# Altium PCB Pogopins.PcbDoc
Units mm, origin at the board's own origin, x right, y up, seen from the top; angles counter-clockwise.
Board outline 69.1 x 54 mm, 2 copper layers (Top Layer, Bottom Layer); 64 components, 45 nets, 235 pads, 26 vias.
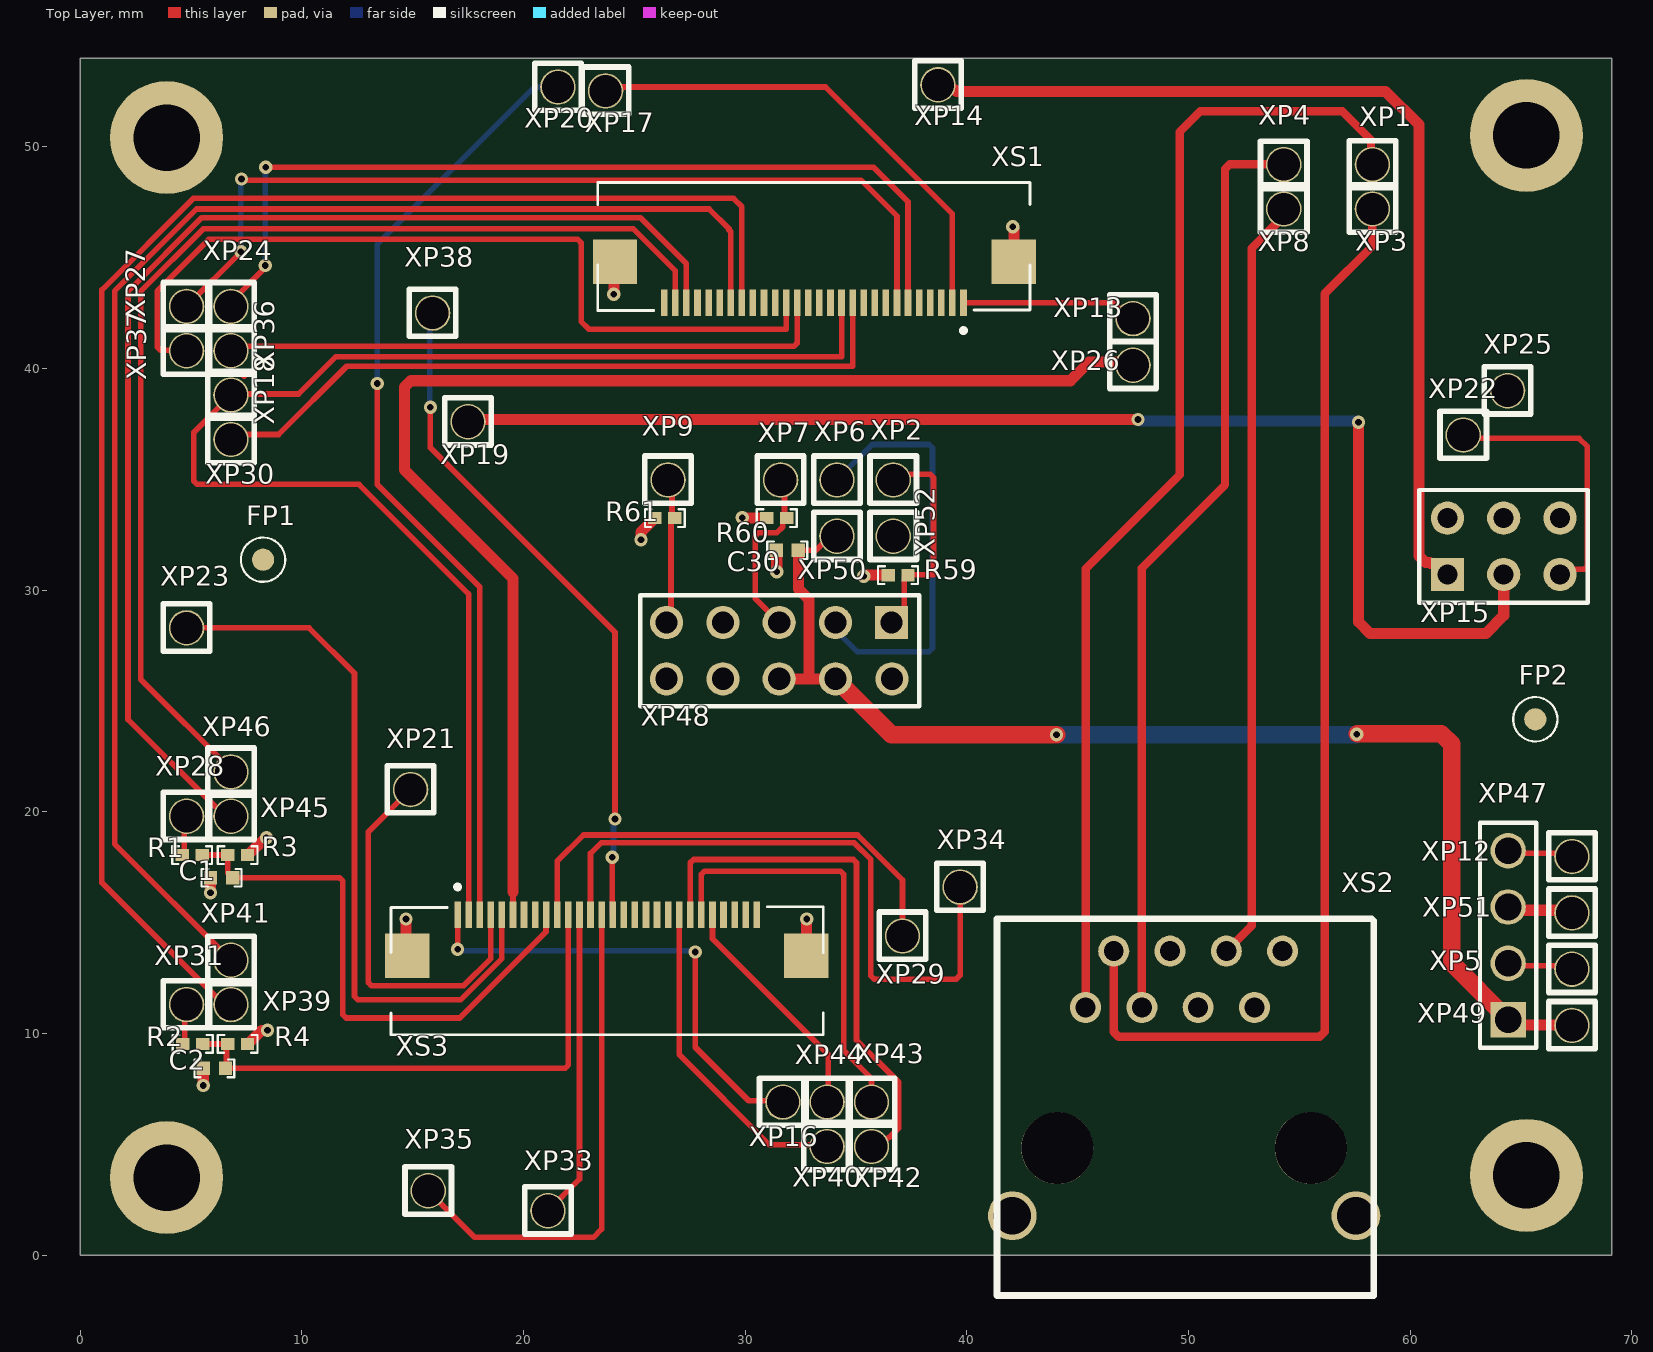
[diagram p0: Top Layer view]
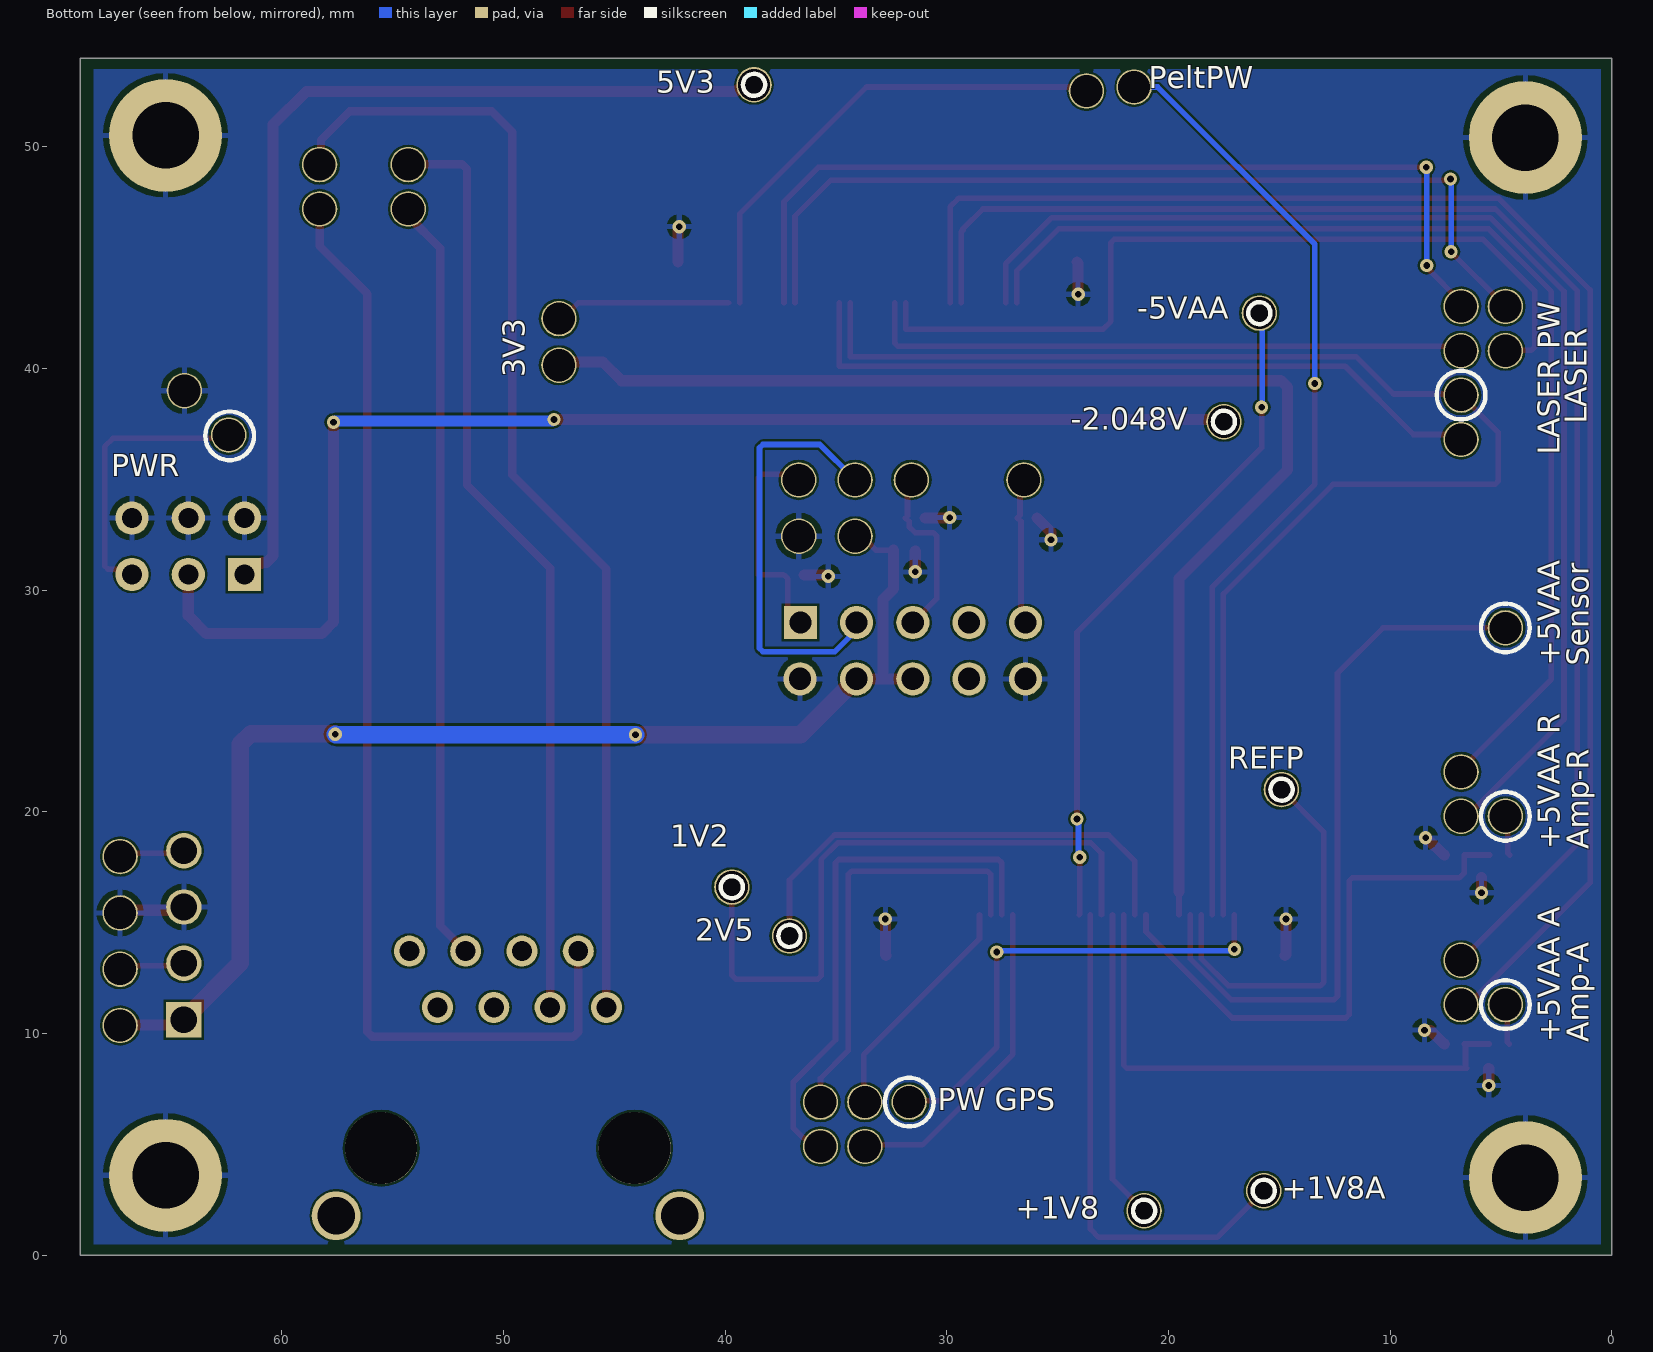
[diagram p1: Bottom Layer view, seen from below]
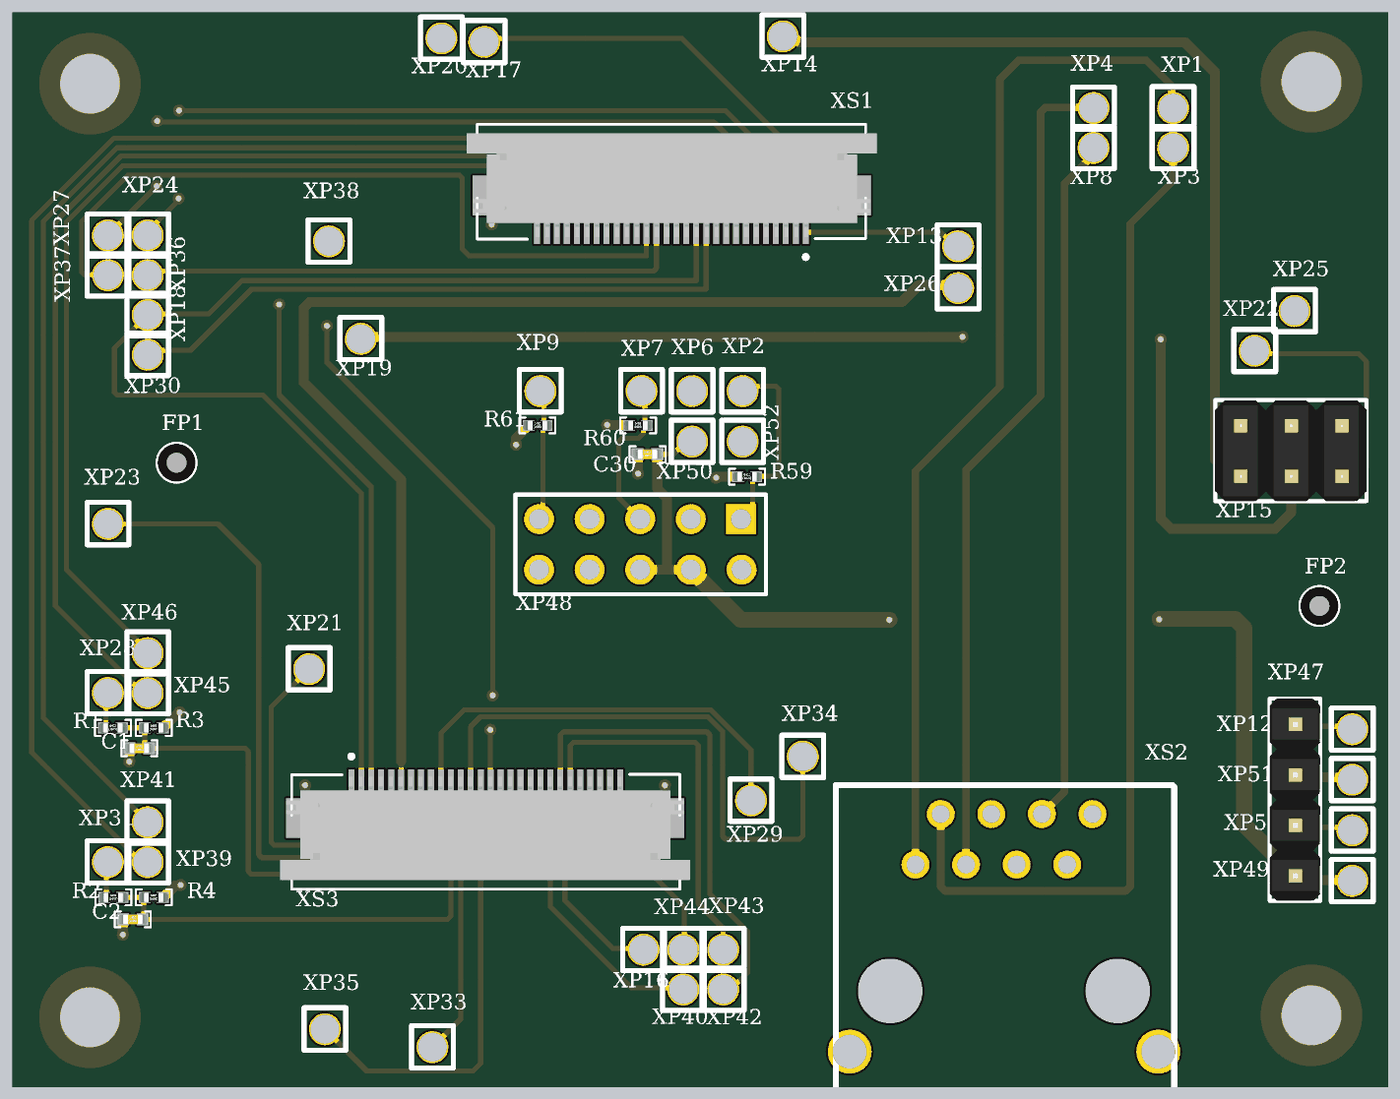
[diagram p2: 3D render of the assembled board from above, using the file's embedded part models]

## Layer stack, top to bottom
Top Solder: solder mask 0.0102, Solder Resist, Dk 3.5
Top Layer: signal copper 0.0356
Dielectric 1: dielectric 0.32, FR-4, Dk 4.8
Bottom Layer: signal copper 0.0356
Bottom Solder: solder mask 0.0102, Solder Resist, Dk 3.5

## Board outline
0,0 0,54 69.1,54 69.1,0

## Design rules (kind name [scope] priority, off if disabled: settings)
Clearance [All] p1: gap=0.1 ignorepadtopadclearanceinfootprint=TRUE
DiffPairsRouting [All] p1: maxlimit=0.254 minlimit=0.254 mostfreqgap=0.254 toplayer_minwidth=0.381 toplayer_maxwidth=0.381 toplayer_prefwidth=0.381 bottomlayer_minwidth=0.381 bottomlayer_maxwidth=0.381 bottomlayer_prefwidth=0.381 maxuncoupledlength=12.7
Height [All] p1: minheight=0 maxheight=35 prefheight=12.7
HoleSize [All] p1: absolutevalues=TRUE maxlimit=5 minlimit=0.025 maxpercent=80.000 minpercent=20.000
MinimumSolderMaskSliver [All] p1: minsoldermaskwidth=0
PolygonConnect [All] p1: connectstyle=Relief reliefconductorwidth=0.254 reliefentries=4 polygonreliefangle="90 Angle" airgapwidth=0.254
RoutingVias [All] p1: holewidth=0.711 width=1.27 viastyle="Through Hole" minholewidth=0.711 minwidth=1.27 maxholewidth=0.711 maxwidth=1.27
SilkToSilkClearance [All] p1: silktosilkclearance=0
SilkToSolderMaskClearance [IsPad] p1: minsilkscreentomaskgap=0 clearancetoexposedcopper=TRUE
SolderMaskExpansion [All] p1: expansion=0.102 istentingtop=FALSE
Width [All] p1: maxlimit=0.8 minlimit=0.1 preferedwidth=0.254
24 further rules are at their usual default settings.

## Classes and differential pairs
differential pair E_TX: +E_TX_P -E_TX_N
differential pair E_RX: +E_RX_P -E_RX_N

## Components (designator, comment, footprint, x,y, rotation, side; value= is the part's Value field where it differs from the comment)
C1 "100nF" 0402C 6.375,17.025 r0 top
C2 "100nF" 0402C 6.05,8.425 r0 top
C30 "10uF" 0402C 31.9,31.8 r0 top
FP1 "FIDUCIAL" "FIDICIAL POINT - R0.3" 8.25,31.375 r0 top
FP2 "FIDUCIAL" "FIDICIAL POINT - R0.3" 65.65,24.175 r0 top
R1 "100K" R0402 5.05,18.05 r0 top
R2 "100K" R0402 5.075,9.525 r0 top
R3 "56K" R0402 7.1,18.05 r0 top
R4 "56K" R0402 7.1,9.525 r0 top
R59 "10K" R0402 36.9,30.675 r0 top
R60 "10K" R0402 31.425,33.25 r0 top
R61 "10K" R0402 26.375,33.25 r0 top
XP1 "PA" "POGO PIN P100-A2/B1" 58.3,49.2 r0 top
XP2 "PA" "POGO PIN P100-A2/B1" 36.68,34.975 r0 top locked
XP3 "PA" "POGO PIN P100-A2/B1" 58.3,47.2 r0 top
XP4 "PA" "POGO PIN P100-A2/B1" 54.3,49.2 r180 top locked
XP5 "PA" "POGO PIN P100-A2/B1" 67.3,12.9 r0 top locked
XP6 "PA" "POGO PIN P100-A2/B1" 34.14,34.975 r0 top locked
XP7 "PA" "POGO PIN P100-A2/B1" 31.6,34.975 r0 top locked
XP8 "PA" "POGO PIN P100-A2/B1" 54.3,47.2 r0 top
XP9 "PA" "POGO PIN P100-A2/B1" 26.52,34.975 r0 top locked
XP12 "PA" "POGO PIN P100-A2/B1" 67.3,17.98 r0 top locked
XP13 "PA" "POGO PIN P100-A2/B1" 47.5,42.25 r0 top
XP14 "PB" "POGO PIN P100-A2/B1" 38.7,52.8 r0 top
XP15 "PLD-6" PLD-6 61.685,30.71 r0 top
XP16 "PB" "POGO PIN P100-A2/B1" 31.7,6.9 r0 top locked
XP17 "PA" "POGO PIN P100-A2/B1" 23.7,52.525 r0 top
XP18 "PB" "POGO PIN P100-A2/B1" 6.8,38.8 r0 top
XP19 "PB" "POGO PIN P100-A2/B1" 17.5,37.6 r0 top
XP20 "PB" "POGO PIN P100-A2/B1" 21.55,52.7 r0 top
XP21 "PB" "POGO PIN P100-A2/B1" 14.907,21.003 r0 top locked
XP22 "PA" "POGO PIN P100-A2/B1" 62.4,37 r0 top
XP23 "PB" "POGO PIN P100-A2/B1" 4.8,28.3 r0 top
XP24 "PA" "POGO PIN P100-A2/B1" 6.8,42.8 r0 top
XP25 "PA" "POGO PIN P100-A2/B1" 64.4,39 r0 top
XP26 "PB" "POGO PIN P100-A2/B1" 47.5,40.15 r0 top
XP27 "PA" "POGO PIN P100-A2/B1" 4.8,42.8 r0 top
XP28 "PA" "POGO PIN P100-A2/B1" 4.8,19.8 r0 top
XP29 "PB" "POGO PIN P100-A2/B1" 37.1,14.4 r0 top
XP30 "PA" "POGO PIN P100-A2/B1" 6.8,36.8 r0 top
XP31 "PA" "POGO PIN P100-A2/B1" 4.8,11.3 r0 top
XP33 "PB" "POGO PIN P100-A2/B1" 21.1,2 r0 top
XP34 "PB" "POGO PIN P100-A2/B1" 39.7,16.602 r0 top locked
XP35 "PB" "POGO PIN P100-A2/B1" 15.7,2.9 r0 top
XP36 "PA" "POGO PIN P100-A2/B1" 6.8,40.8 r0 top
XP37 "PA" "POGO PIN P100-A2/B1" 4.8,40.8 r0 top
XP38 "PB" "POGO PIN P100-A2/B1" 15.9,42.5 r0 top
XP39 "PA" "POGO PIN P100-A2/B1" 6.8,11.3 r0 top
XP40 "PA" "POGO PIN P100-A2/B1" 33.7,4.9 r0 top locked
XP41 "PA" "POGO PIN P100-A2/B1" 6.8,13.3 r0 top
XP42 "PA" "POGO PIN P100-A2/B1" 35.7,4.9 r0 top locked
XP43 "PA" "POGO PIN P100-A2/B1" 35.7,6.9 r0 top locked
XP44 "PA" "POGO PIN P100-A2/B1" 33.7,6.9 r0 top locked
XP45 "PA" "POGO PIN P100-A2/B1" 6.8,19.8 r0 top locked
XP46 "PA" "POGO PIN P100-A2/B1" 6.8,21.8 r0 top locked
XP47 "PLS-4" PLS-4 64.425,14.435 r90 top
XP48 "20021111-00010T4LF" 20021111-00010T4LF 36.6,28.54 r180 top
XP49 "PA" "POGO PIN P100-A2/B1" 67.3,10.36 r0 top locked
XP50 "PA" "POGO PIN P100-A2/B1" 34.14,32.435 r0 top locked
XP51 "PA" "POGO PIN P100-A2/B1" 67.3,15.44 r0 top locked
XP52 "PA" "POGO PIN P100-A2/B1" 36.68,32.435 r0 top locked
XS1 "52437-2833" MOLEX_52437-2833 33.125,44.5 r180 top
XS2 "DS1126" DS1126 45.36,11.175 r0 top
XS3 "52437-2833" MOLEX_52437-2833 23.75,13.825 r0 top

## Footprints (in the part's own frame and the unit in brackets; to place one, negate y for a bottom-side part, rotate by r counter-clockwise, add the part's x,y. Pads: shape width x height; smd on the part's side, far side on the other; paste and mask are expansions set on the pad)
0402C [mm]
  rect 0.6x0.6 smd: 1(-0.5,0) 2(0.5,0)
  silkscreen extent -0.9,-0.4 0.9,0.4, body extent -0.73,-0.25 0.73,0.25, height 0.51
20021111-00010T4LF [mm]
  rect 1.5x1.5 hole 1: 1(0,0)
  round 1.5 hole 1: 2(-0.025,2.54) 3(2.525,0) 4(2.525,2.54) 5(5.065,0) 6(5.065,2.54) 7(7.605,0) 8(7.605,2.54) 9(10.145,0) 10(10.145,2.54)
  silkscreen extent -1.25,-1.23 11.34,3.77
DS1126 [mm] "RJ-45 Sheilded Connector"
  round 1.4 hole 0.9: 1(0,0) 2(1.27,2.54) 3(2.54,0) 4(3.81,2.54) 5(5.08,0) 6(6.35,2.54) 7(7.62,0) 8(8.89,2.54)
  round 2.2 hole 1.7: 9(-3.305,-9.4) 10(12.195,-9.4)
  round 3.25 hole 3.25 unplated: 11(10.16,-6.35) 12(-1.27,-6.35)
  silkscreen extent -4,-13 13,4
"FIDICIAL POINT - R0.3" [mm]
  round 1 smd mask+0.5: 1(0,0)
  Top Layer pour cut-out: -0.956,0.021 -0.888,-0.347 -0.684,-0.66 -0.376,-0.872 -0.01,-0.95 -0.01,-0.95 0.353,-0.887 0.664,-0.691 0.877,-0.39 0.958,-0.03 0.956,0 0.889,0.36 0.69,0.667 0.388,0.874 0.03,0.95 0.03,0.95 -0.339,0.888 -0.655,0.69 -0.872,0.385 -0.956,0.021
  silkscreen extent -1,-1 1,1
MOLEX_52437-2833 [mm] "Easy-On FFC/FPC Connector, 0.50mm Pitch, Slider Series, Right-Angle, Bottom Contact, 2.00mm Height, 28 Circuits, Tin-Silver-Bismuth Plating"
  rect 0.3x1.2 smd: 1(-6.725,1.538) 2(-6.225,1.538) 3(-5.725,1.538) 4(-5.225,1.538) 5(-4.725,1.538) 6(-4.225,1.538) 7(-3.725,1.538) 8(-3.225,1.538) 9(-2.725,1.538) 10(-2.225,1.538) 11(-1.725,1.538) 12(-1.225,1.538) 13(-0.725,1.538) 14(-0.225,1.538) 15(0.275,1.538) 16(0.775,1.538) 17(1.275,1.538) 18(1.775,1.538) 19(2.275,1.538) 20(2.775,1.538) 21(3.275,1.538) 22(3.775,1.538) 23(4.275,1.538) 24(4.775,1.538) 25(5.275,1.538) 26(5.775,1.538) 27(6.275,1.538) 28(6.775,1.538)
  rect 2x2 smd: S1(-9,-0.312) S2(9,-0.312)
  silkscreen extent -9.72,-3.89 9.78,2.89, body extent -10.3,-3.42 10.3,1.78, height 2
PLD-6 [mm]
  rect 1.5x1.5 hole 0.9: 1(0,0)
  round 1.5 hole 0.9: 2(0,2.54) 3(2.54,0) 4(2.54,2.54) 5(5.08,0) 6(5.08,2.54)
  silkscreen extent -1.27,-1.27 6.32,3.81, body extent -1.27,-1.27 6.35,3.81, height 9.2
PLS-4 [mm]
  rect 1.6x1.6 hole 1.2: 1(-3.81,0)
  round 1.6 hole 1.2: 2(-1.27,0) 3(1.27,0) 4(3.81,0)
  silkscreen extent -5.08,-1.27 5.08,1.27, body extent -5.08,-1.27 5.08,1.27, height 9.2
"POGO PIN P100-A2/B1" [mm]
  round 1.6 hole 1.45: 1(0,0)
  silkscreen extent -1.05,-1.05 1.05,1.08, body extent -0.69,-0.7 0.7,0.7, height 33.35
R0402 [mm] "Resistor 0402"
  rect 0.6x0.55 smd: 1(-0.45,0) 2(0.45,0)
  silkscreen extent -0.9,-0.4 0.9,0.4, body extent -0.73,-0.25 0.73,0.25, height 0.51

## Part data
C1 C2: library part "C0402-100nF 10% 50V", "C0402-100nF 10% 50V", Part Number="SMD CAP CER 100nF ±10% 50V X5R 0402", Added_by=Rutel@Mail.ru, Created_at=27/03/2020, Mount=MOUNT, MountType=SMD, Pkg=0402, Solder_Amount=2
C30: library part "C0402-10UF 10% 10V", "C0402-10UF 10% 10V", Part Number="SMD CAP CER 10UF ±10% 10V X5R 0402", Added_by=Rutel@Mail.ru, Created_at=27/03/2020, Mount=MOUNT, MountType=SMD, Pkg=0402, Solder_Amount=2
FP1 FP2: library part FIDUCIAL_R1, Adder_by=ridel_av@teslatec.ru, Created_at=22/03/2020, Mount=-, MountType=-, Pkg=-, Solder_Amount=-
R1 R2: library part R0402-100K, "Resistor SMD 100K 1% 0402", Part Number="SMD RES 100 KOHM 1% ±100ppm/°C 0402", Added_by=Rutel@teslatec.ru, Created_at=21/04/2020, Mount=MOUNT, MountType=SMD, Pkg=0402, Solder_Amount=2
R3 R4: library part R0402-56K, "Resistor SMD 56K 1% 0402", Part Number="SMD RES 56K KOHM 1% ±100ppm/°C 0402", Added_by=ridel_av@teslatec.ru, Created_at=15/12/2021, Mount=MOUNT, MountType=SMD, Pkg=0402, Solder_Amount=2
R59 R60 R61: library part R0402-10K, "Resistor SMD 10K 1% 0402", Part Number="SMD RES 10 KOHM 1% ±100ppm/°C 0402", Added_by=Rutel@teslatec.ru, Created_at=21/04/2020, Mount=MOUNT, MountType=SMD, Pkg=0402, Solder_Amount=2
XP1 XP2 XP3 XP4 XP5 XP6 XP7 XP8 XP9 XP12 XP13 XP17 XP22 XP24 XP25 XP27 XP28 XP30 XP31 XP36 XP37 XP39 XP40 XP41 XP42 XP43 XP44 XP45 XP46 XP49 XP50 XP51 XP52: library part "P100-A2 / P100-A", "Pogo pin, 33.35x1.36", Added_by=irdolgopolowa@yandex.ru, Created_at=29/10/24, Mount=MOUNT, MountType=THM, Part Number="P100-A2 / P100-A"
XP14 XP16 XP18 XP19 XP20 XP21 XP23 XP26 XP29 XP33 XP34 XP35 XP38: library part P100-B1, "Pogo pin, 33.35x1.36", Added_by=irdolgopolowa@yandex.ru, Created_at=29/10/24, Mount=MOUNT, MountType=THM, Part Number=P100-B1
XP15: "Pin Header Pitch 2.54mm", Part Number="PLD-6 (DS1021-2x3)", Added_by=ponomarev_ke@teslatec.ru, Created_at=21/05/2019, Mount=MOUNT, MountType=THM, Pkg="PLD-6 2.54mm", Solder_Amount=6
XP47: "HEADER 2.54mm", Added_by=irdolgopolowa@yandex.ru, Cable/Wire="МГТФ 0,35 кв.мм ГОСТ", Created_at=29/10/24, Mating Part=BLS-4, Mating Terminals="BL-T (DS-1071)", Mount=MOUNT, MountType=THM, Part Number=PLS-4, Pkg=PLS-4, Solder_Amount=4
XP48: "20021111-00010T4LF. pin 10", Added_by=irdolgopolowa@yandex.ru, Created_at=29/10/24, Mount=MOUNT, MountType=THM, Part Number=20021111-00010T4LF, Pkg=20021111-00010T4LF, Solder_Amount=10
XS1 XS3: "28 Position FFC, FPC Connector Contacts, Bottom 0.020 _0.50mm_ Surface Mount, Right Angle", Part Number="52437-2833 (MOLEX)", Added_by=ridel_av@teslatec.ru, Mating Part="FFCA 28pin, 0.5mm pitch, AVM 20624 80C 60V VW-1", Mount=MOUNT, MountType=SMD, Pkg=52437-2833, Solder_Amount=30
XS2: "Ethernet PCB 8/8 RJ45", Added_by=irdolgopolowa@yandex.ru, Created_at=29/10/24, Mount=MOUNT, MountType=THM, Part Number=DS1126, Pkg=RJ-45, Solder_Amount=12

## Free pads (board coordinates)
  round 5.1 hole 3 mask+0.102: 1(3.9,50.422) 2(65.25,50.52) 3(65.25,3.6) 4(3.9,3.5)
  round 0.113 on Bottom Overlay: 1(4.114,11.3) 1(4.114,19.8) 1(4.114,28.3) 1(4.114,40.8) 1(4.114,42.8) 1(5.474,11.3) 1(5.474,19.8) 1(5.474,28.3) 1(5.474,40.8) 1(5.474,42.8) 1(6.114,11.3) 1(6.114,13.3) 1(6.114,19.8) 1(6.114,21.8) 1(6.114,36.8) 1(6.114,38.8) 1(6.114,40.8) 1(6.114,42.8) 1(7.474,11.3) 1(7.474,13.3) 1(7.474,19.8) 1(7.474,21.8) 1(7.474,36.8) 1(7.474,38.8) 1(7.474,40.8) 1(7.474,42.8) 1(21.114,52.7) 1(22.474,52.7) 1(31.014,6.9) 1(32.374,6.9) 1(38.014,52.8) 1(39.374,52.8) 1(46.814,40.3) 1(48.174,40.3) 1(53.614,47.2) 1(53.614,49.2) 1(54.974,47.2) 1(54.974,49.2) 1(57.614,47.2) 1(57.614,49.2) 1(58.974,47.2) 1(58.974,49.2) 1(61.714,37) 1(63.074,37) 1(63.714,39) 1(65.074,39)
  round 1.373 on Bottom Overlay: 1(4.8,11.3) 1(4.8,19.8) 1(4.8,28.3) 1(4.8,40.8) 1(4.8,42.8) 1(6.8,11.3) 1(6.8,13.3) 1(6.8,19.8) 1(6.8,21.8) 1(6.8,36.8) 1(6.8,38.8) 1(6.8,40.8) 1(6.8,42.8) 1(21.8,52.7) 1(23.6,52.7) 1(31.7,6.9) 1(38.7,52.8) 1(47.5,40.3) 1(47.5,42.1) 1(54.3,47.2) 1(54.3,49.2) 1(58.3,47.2) 1(58.3,49.2) 1(62.4,37) 1(64.4,39)

## Via types
v1: diameter 0.6, hole 0.3, Top Layer to Bottom Layer, tented both sides, 26 vias

## Nets (pads, with @x,y where several pads share a name; then routed paths per layer and width w, separated by ;. In a path a pad name is that pad's centre, name@x,y a point inside that pad or via, vN(x,y) a via of type N, cw(c..) or ccw(c..) an arc to the next point about the centre after c; other vN are vias at no path point)
3.3V: C30.2 XP47.1 XP48.4 XP48.6 XP49.1 XP50.1 | length 56.1
  Top Layer w0.254: XP48.6 XP48.6 ; C30.2 33.192,31.8 33.881,32.49 XP50.1@34.172,32.49 ; XP48.4@34.074,25.999 XP48.4 ; XP47.1 XP47.1@64.66,10.39
  Top Layer w0.5: XP48.6 32.875,25.999 ; C30.2 32.4,30.05 32.875,29.575 32.875,25.999 ; XP48.4@34.074,25.999 32.875,25.999 ; XP47.1@64.66,10.39 XP49.1@67.322,10.39
  Top Layer w0.8: XP48.4 36.6,23.475 v1(44.05,23.475) ; v1@57.625,23.525 61.406,23.525 61.875,23.056 61.875,13.175 XP47.1
  Bottom Layer w0.8: v1(44.05,23.475) 57.575,23.475 v1(57.6,23.5)
4V_Laser: XP18.1 XS1.12 XS3.2 | length 64.2
  Top Layer w0.254: XS3.2 17.525,29.825 12.575,34.775 5.274,34.775 5.125,34.924 5.125,37.125 XP18.1 6.85,38.85 9.85,38.85 11.525,40.525 34.35,40.525 XS1.12
+1.2V: XP34.1 XS3.13 | length 29.3
  Top Layer w0.254: XS3.13 23.025,18.125 23.5,18.6 34.925,18.6 35.675,17.85 35.675,12.599 35.824,12.45 39.525,12.45 39.7,12.625 XP34.1@39.7,16.6
+1.8V: XP33.1 XS3.12 | length 14
  Top Layer w0.254: XP33.1 22.525,3.425 XS3.12
+1.8VA: XP35.1 XS3.14 | length 23
  Top Layer w0.254: XP35.1 17.8,0.8 23.151,0.8 23.525,1.174 XS3.14
+2.5V: XP29.1 XS3.10 | length 21.8
  Top Layer w0.254: XS3.10 21.525,17.775 22.704,18.954 35.072,18.954 37.1,16.926 XP29.1
+3.3V: XP26.1 XS3.6 | length 59.2
  Top Layer w0.254: XS3.6 19.525,16.375
  Top Layer w0.5: 19.525,16.375 19.525,30.525 14.625,35.425 14.625,39.157 14.918,39.45 44.675,39.45 45.525,40.3 XP26.1@47.5,40.3
+5V3: XP14.1 XP15.1 | length 43.6
  Top Layer w0.5: XP14.1@38.692,52.84 38.942,52.59 39.453,52.59 39.543,52.5 58.9,52.5 60.4,51 60.4,31.55 60.703,31.247 60.892,31.247 60.929,31.21 61.185,31.21 XP15.1
+5V_Amq-R: R1.1 XP28.1 | length 1.8
  Top Layer w0.254: R1.1 4.7,18.15 4.7,19.7 XP28.1
+5V_Amq-R2: C1.2 R1.2 R3.1 XS3.9 | length 24.9
  Top Layer w0.254: R1.2 R3.1 6.65,17.25 C1.2 11.701,17.025 11.85,16.876 11.85,10.849 11.999,10.7 17.125,10.7 21.016,14.591 21.016,15.353 XS3.9
+5V_GPS: XP16.1 XS3.1 | length 21.7
  Top Layer w0.254: v1@16.975,13.75 v1(17.025,13.8) XS3.1 ; v1(27.75,13.675) 27.75,9.375 30.16,6.965 XP16.1@31.747,6.965
  Bottom Layer w0.254: v1(17.025,13.8) 17.088,13.738 27.687,13.738 v1(27.75,13.675)
+5V_PeltPW: XP20.1 XS3.3 | length 43.5
  Top Layer w0.254: v1(13.4,39.325) 13.4,34.775 18.025,30.15 XS3.3
  Bottom Layer w0.254: v1(13.4,39.325) 13.4,45.611 20.489,52.7 XP20.1@21.8,52.7
+5V_REFP: XP21.1 XS3.4 | length 17.6
  Top Layer w0.254: XP21.1@14.9,21 13,19.1 13,12.299 13.149,12.15 17.3,12.15 18.525,13.375 XS3.4 XS3.4@18.516,15.353
+5VAA_Amq-A: R2.1 XP31.1 | length 1.8
  Top Layer w0.254: R2.1 4.713,9.613 4.713,11.213 XP31.1
+5VAA_Amq-A2: C2.2 R2.2 R4.1 XS3.11 | length 24.6
  Top Layer w0.254: R2.2 R4.1 6.6,9.475 6.6,8.475 C2.2 21.876,8.425 22.025,8.574 XS3.11
+5VAA_sensor: XP23.1 XS3.5 | length 32.5
  Top Layer w0.254: XP23.1 10.325,28.3 12.375,26.25 12.375,11.674 12.524,11.525 17.176,11.525 19.025,13.374 XS3.5
-2.048V: XP15.3 XP19.1 | length 58.2
  Top Layer w0.5: XP19.1 17.6,37.7 v1(47.725,37.7) ; v1(57.675,37.575) 57.675,28.575 58.2,28.05 63.425,28.05 64.225,28.85 XP15.3
  Bottom Layer w0.5: v1(47.725,37.7) 47.788,37.637 57.613,37.637 v1(57.675,37.575)
-5VAA: XP38.1 XS3.15 | length 30.7
  Top Layer w0.254: v1(15.8,38.25) 15.8,36.425 24.125,28.1 v1(24.125,19.675) ; v1(24,17.95) 24,15.388 XS3.15
  Bottom Layer w0.254: v1@15.775,38.25 15.775,42.375 XP38.1 ; v1(24,17.95) 24.062,18.012 24.062,19.613 v1(24.125,19.675)
ADC_ACM_IN: XP41.1 XS1.22 | length 65.4
  Top Layer w0.254: XP41.1 1.55,18.55 1.55,43.5 5.25,47.2 28.375,47.2 29.271,46.304 29.271,46.25 29.35,46.171 XS1.22
ADC_ACM_OUT: XP39.1 XS1.21 | length 69.9
  Top Layer w0.254: XP39.1 6.475,11.3 0.975,16.8 0.975,43.55 5.1,47.675 29.476,47.675 29.85,47.301 XS1.21
ADC_REP_IN: XP46.1 XS1.27 | length 50.8
  Top Layer w0.254: XP46.1@6.842,21.865 2.725,25.981 2.725,43.475 5.55,46.3 24.959,46.3 26.85,44.409 XS1.27
ADC_REP_OUT: XP45.1 XS1.26 | length 55
  Top Layer w0.254: XP45.1@6.842,19.865 6.477,19.865 6.087,20.255 6.07,20.255 2.158,24.167 2.158,43.483 5.475,46.8 25.275,46.8 27.35,44.725 XS1.26
E_RX_N: XP8.1 XS2.6 | length 34.6
  Top Layer w0.381: XS2.6 52.85,14.855 52.85,45.42 54.3,46.87 XP8.1
E_RX_P: XP4.1 XS2.3 | length 42.1
  Top Layer w0.381: XS2.3 47.9,31 51.65,34.75 51.65,49.002 51.873,49.225 XP4.1@54.3,49.225
E_TX_N: XP3.1 XS2.2 | length 51.4
  Top Layer w0.381: XS2.2 46.63,10.073 46.853,9.85 55.92,9.85 56.143,10.073 56.143,43.375 58.3,45.532 XP3.1
E_TX_P: XP1.1 XS2.1 | length 51.9
  Top Layer w0.381: XS2.1 45.36,30.96 49.6,35.2 49.6,50.671 50.529,51.6 56.95,51.6 58.236,50.314 58.236,49.264 XP1.1
GND: C1.1 C2.1 C30.1 pad.1@3.9,50.422 pad.2 pad.3 pad.4 R3.2 R4.2 R59.1 R60.1 R61.1 XP15.2 XP15.4 XP15.6 XP25.1 XP47.3 XP48.2 XP48.10 XP51.1 XP52.1 XS1.S1 XS1.S2 XS3.S1 XS3.S2 | length 17.8
  Top Layer w0.254: XP15.2 XP15.2@61.685,33.359 ; XP47.3 XP47.3@64.57,15.56 ; XP51.1@67.202,15.56 XP51.1@67.347,15.415
  Top Layer w0.5: v1(5.55,7.65) C2.1 ; v1(5.875,16.35) C1.1 ; R4.2 7.575,9.525 8.181,10.131 8.431,10.131 v1(8.45,10.15) ; R3.2 7.575,18.05 8.331,18.806 8.381,18.806 v1(8.4,18.825) ; v1(14.7,15.164) 14.7,13.563 XS3.S1 ; v1(24.075,43.35) 24.075,44.762 XS1.S2 ; v1(25.3,32.275) 25.3,32.625 R61.1 ; v1(29.875,33.275) 29.887,33.263 30.963,33.263 R60.1 ; v1(31.425,30.825) C30.1@31.425,31.775 ; XS3.S2 32.775,13.537 v1(32.775,15.164) ; v1(35.35,30.625) 35.377,30.625 35.427,30.675 R59.1 ; v1(42.075,46.4) 42.075,46.373 42.125,46.323 XS1.S1 ; XP47.3@64.57,15.56 XP51.1@67.202,15.56
GPS_RX: XP44.1 XS3.24 | length 10.6
  Top Layer w0.254: XS3.24 28.525,14.275 33.747,9.053 XP44.1@33.747,6.94
GPS_TX: XP43.1 XS3.23 | length 19.1
  Top Layer w0.254: XS3.23 28.025,17.176 28.174,17.325 34.301,17.325 34.45,17.176 34.45,9.225 35.703,7.972 35.703,6.984 XP43.1@35.747,6.94
Ipower_ACM: XP15.5 XP22.1 | length 12.6
  Top Layer w0.254: XP22.1 62.55,36.85 67.625,36.85 68,36.475 68,31.099 67.85,30.948 67.003,30.948 XP15.5
Laser_ACM_OUT: XP30.1 XS1.11 | length 32.2
  Top Layer w0.254: XP30.1@6.872,36.865 7.033,37.025 8.95,37.025 12.025,40.1 34.85,40.1 XS1.11
Peltie_ACM_IN: XP27.1 XS1.7 | length 41
  Top Layer w0.254: XP27.1 4.8,42.813 7.25,45.263 v1(7.25,45.275) ; v1(7.275,48.55) 7.325,48.5 35.225,48.5 36.85,46.875 XS1.7
  Bottom Layer w0.254: v1(7.25,45.275) 7.25,48.525 v1(7.275,48.55)
Peltie_ACM_OUT: XP24.1 XS1.6 | length 41.1
  Top Layer w0.254: XP24.1 6.8,43.006 8.35,44.556 v1(8.35,44.65) ; v1(8.375,49.075) 35.8,49.075 37.35,47.525 XS1.6
  Bottom Layer w0.254: v1(8.35,44.65) 8.35,49.05 v1(8.375,49.075)
R1_IN: XP17.1 XS1.2 | length 21.9
  Top Layer w0.254: XP17.1@23.85,52.7 33.625,52.7 39.35,46.975 XS1.2
R22_IN: XP13.1 XS1.1 | length 7.9
  Top Layer w0.254: XS1.1 46.638,42.962 47.35,42.25 XP13.1
RS232_RX: XP40.1 XS3.21 | length 14.7
  Top Layer w0.254: XS3.21 27.025,14.425 27.025,9.05 31.1,4.975 33.712,4.975 XP40.1@33.747,4.94
RS232_TX: XP42.1 XS3.22 | length 24.2
  Top Layer w0.254: XS3.22 27.525,16.25 27.525,17.701 27.674,17.85 34.876,17.85 35.025,17.701 35.025,9.7 36.928,7.797 36.928,5.728 36.525,5.325 36.496,5.325 36.112,4.94 XP42.1@35.747,4.94
SWCLK: XP5.1 XP47.2 | length 3
  Top Layer w0.254: XP47.2 64.532,13.057 67.242,13.057 XP5.1@67.35,12.95
SWDIO: XP12.1 XP47.4 | length 3
  Top Layer w0.254: XP47.4 64.547,18.123 67.202,18.123 XP12.1@67.325,18
TCK: R59.2 XP2.1 XP48.1 | length 10.4
  Top Layer w0.254: XP48.1 37.175,29.115 37.175,30.378 37.177,30.38 37.177,30.527 37.325,30.675 R59.2 37.375,30.7 38.5,30.7 38.5,35.076 38.351,35.225 36.958,35.225 XP2.1@36.772,35.04
  Bottom Layer w0.254: XP48.1 XP48.1@36.885,28.825 ; XP2.1@36.772,35.04 XP2.1@36.873,35.141
TDI: R61.2 XP9.1 XP48.9 | length 6.8
  Top Layer w0.254: XP48.9 26.652,28.737 26.652,33.102 26.8,33.25 R61.2 26.699,33.376 26.699,34.913 XP9.1@26.572,35.04
TDO: XP6.1 XP48.3 | length 19.2
  Bottom Layer w0.254: XP48.3 34.075,28.203 35.053,27.225 38.301,27.225 38.45,27.374 38.45,36.426 38.301,36.575 35.733,36.575 XP6.1@34.197,35.04
TMS: R60.2 XP7.1 XP48.5 | length 8.1
  Top Layer w0.254: XP48.5 30.456,29.619 30.456,32.445 30.604,32.594 31.433,32.594 31.702,32.863 31.702,33.102 31.85,33.25 R60.2 31.774,33.351 31.774,34.938 XP7.1@31.672,35.04
TR_ACM_IN: XP37.1 XS1.17 | length 38.2
  Top Layer w0.254: XP37.1 4.775,40.825 3.624,40.825 3.475,40.974 3.475,43.5 5.8,45.825 22.451,45.825 22.6,45.676 22.6,42.125 22.95,41.775 31.85,41.775 XS1.17
TR_ACM_OUT: XP36.1 XS1.16 | length 27.5
  Top Layer w0.254: XP36.1 7,41 32.201,41 32.35,41.149 XS1.16
pads on no net: FP1.1 FP2.1 XP48.7 XP48.8 XS1.3 XS1.4 XS1.5 XS1.8 XS1.9 XS1.10 XS1.13 XS1.14 XS1.15 XS1.18 XS1.19 XS1.20 XS1.23 XS1.24 XS1.25 XS1.28 XS2.4 XS2.5 XS2.7 XS2.8 XS2.9 XS2.10 XS2.11 XS2.12 XS3.7 XS3.8 XS3.16 XS3.17 XS3.18 XS3.19 XS3.20 XS3.25 XS3.26 XS3.27 XS3.28
copper on no net: | length 0.5
  Top Layer w0.254: 7.129,39.827 7.225,39.827 7.402,39.65
  Top Layer w0.5: 42.05,1.775 42.055,1.775 ; 57.555,1.775 57.7,1.775

## Polygon pours and split planes (outlines as drawn)
GND on Bottom Layer "GND" (solid, pour order 0): 0.5,53.5 68.5,53.5 68.5,0.5 0.5,0.5

## Silkscreen, mask and mechanical layers (free items; w line width, h text height)
Bottom Overlay:
  circle w0.2: c4.8,28.3 r1.1
  circle w0.2: c4.8,19.8 r1.1
  circle w0.2: c4.8,11.3 r1.1
  circle w0.2: c21.1,2 r0.5
  circle w0.2: c37.1,14.4 r0.5
  circle w0.2: c39.7,16.6 r0.5
  circle w0.2: c17.5,37.6 r0.5
  circle w0.2: c14.9,21 r0.5
  circle w0.2: c15.9,42.5 r0.5
  circle w0.2: c31.7,6.9 r1.1
  circle w0.2: c62.359,36.964 r1.1
  circle w0.2: c6.8,38.8 r1.1
  circle w0.2: c38.7,52.8 r0.5
  circle w0.2: c15.7,2.9 r0.5
  text "PeltPW" at 20.9,52.3 h1.7
  text "5V3" at 43.1,52.1 h1.7
  text "-5VAA" at 21.4,41.9 h1.7
  text "3V3" at 48.7,39.6 h1.7 r270
  text "LASER" at 0.8,37.5 h1.7 r270
  text "-2.048V" at 24.4,36.9 h1.7
  text "LASER PW" at 2,36.1 h1.7 r270
  text "PWR" at 67.7,34.8 h1.7
  text "Sensor" at 0.7,26.6 h1.7 r270
  text "+5VAA" at 2,26.6 h1.7 r270
  text "REFP" at 17.3,21.6 h1.7
  text "Amp-R" at 0.7,18.3 h1.7 r270
  text "+5VAA R" at 2,18.3 h1.7 r270
  text "1V2" at 42.475,18.075 h1.7
  text "2V5" at 41.35,13.85 h1.7
  text "Amp-A" at 0.7,9.6 h1.7 r270
  text "+5VAA A" at 2,9.6 h1.7 r270
  text "PW GPS" at 30.4,6.2 h1.7
  text "+1V8A" at 14.9,2.2 h1.7
  text "+1V8" at 26.9,1.3 h1.7
Mechanical 4:
  the board outline again, w0.2
Mechanical 24:
  the board outline again, w0.2